# EAGLE board GNSS_Splitter-Panel (EAGLE 9.6.2), part 1 of 3
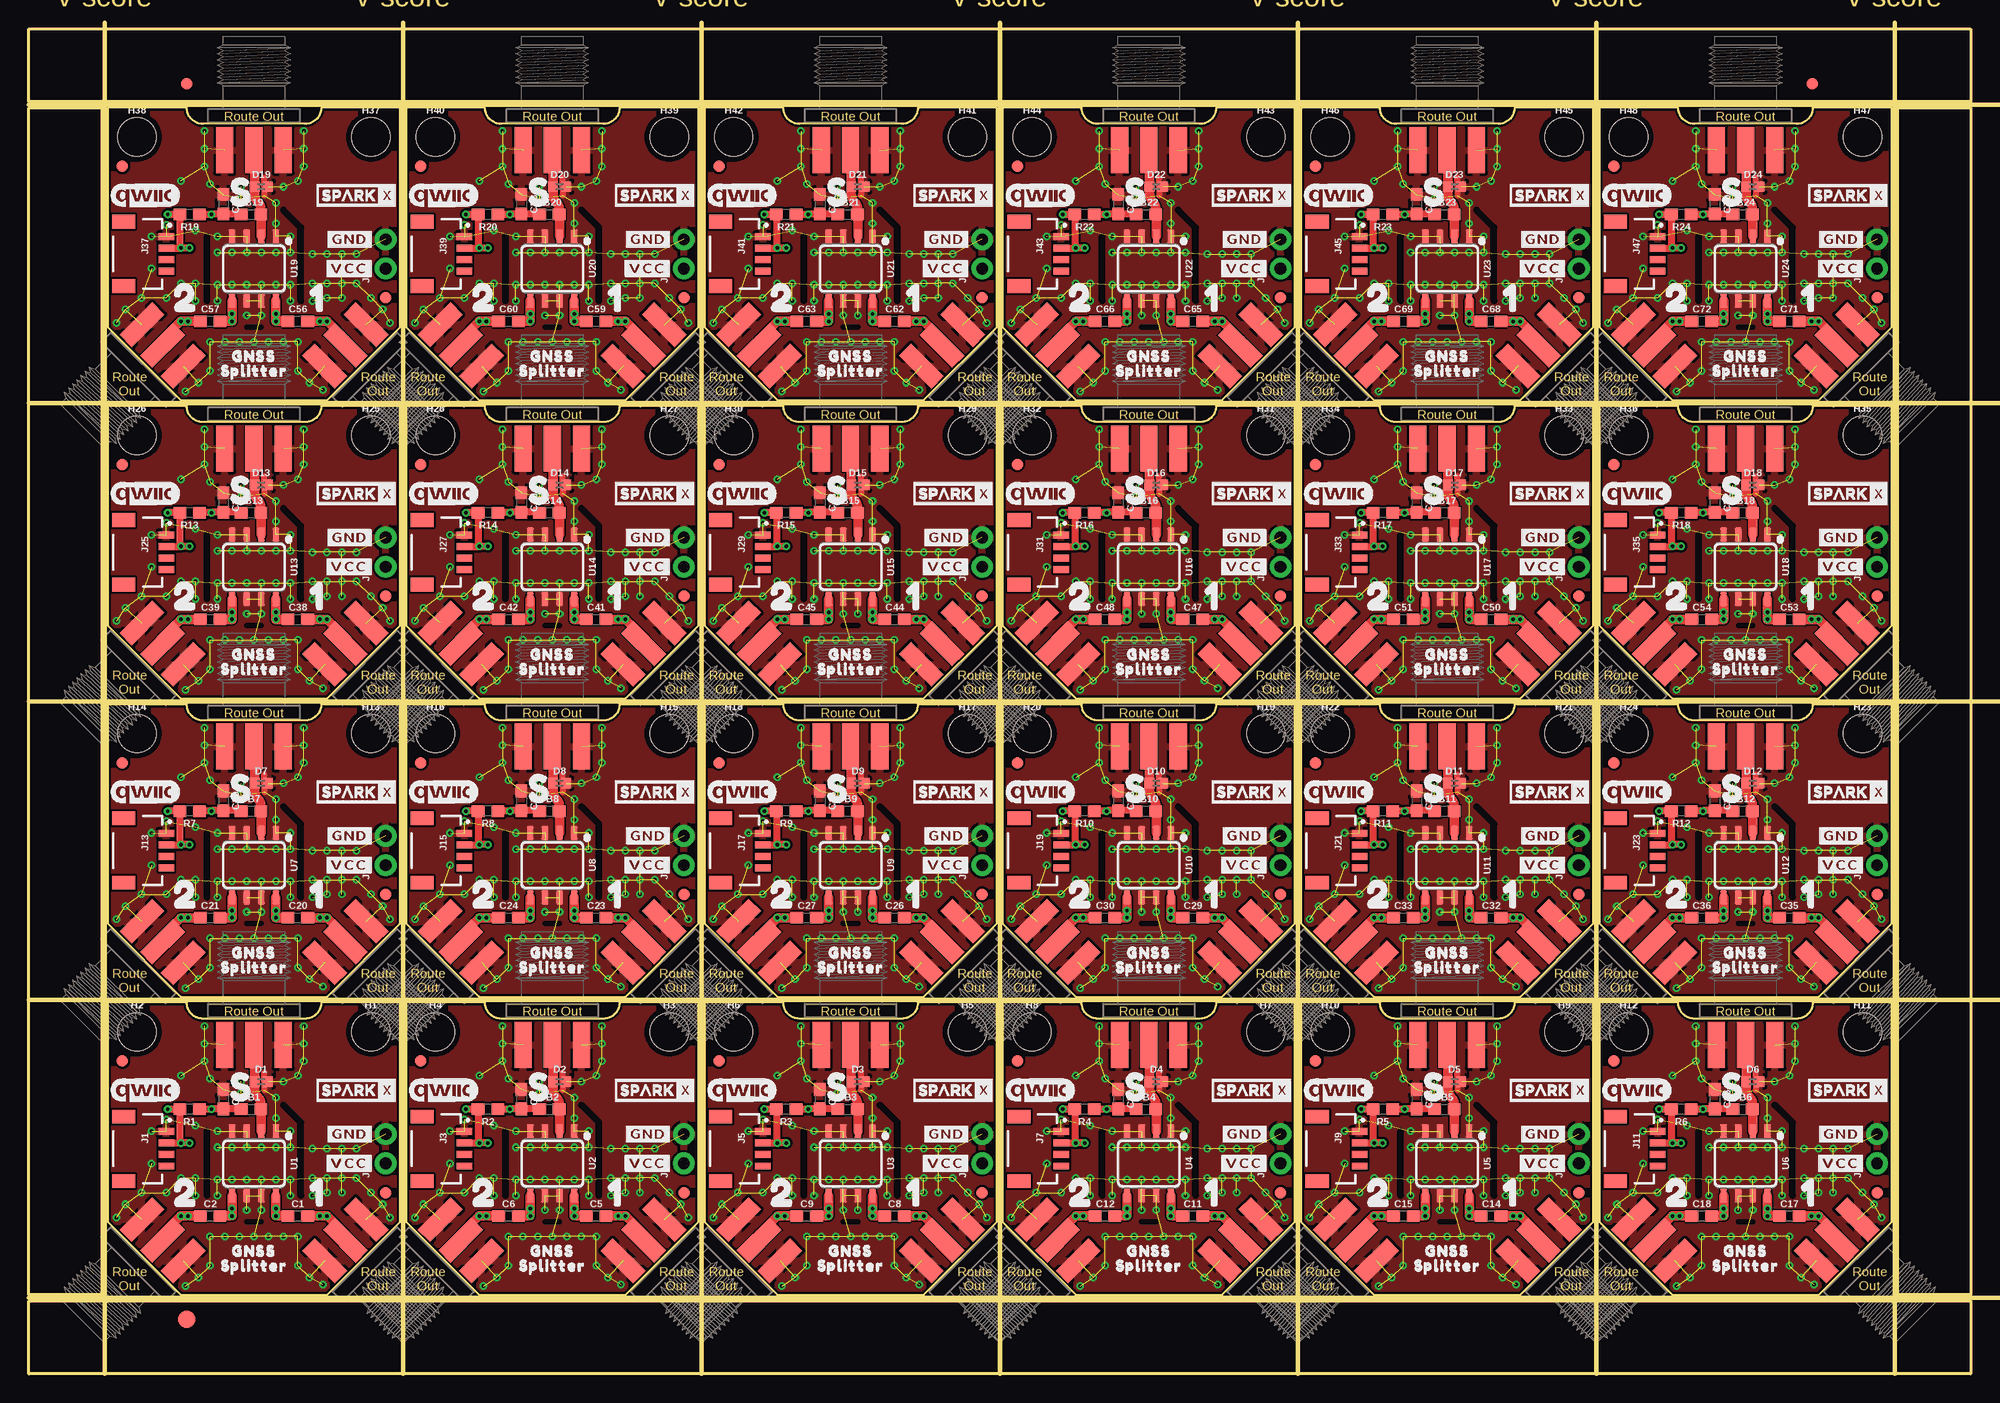
[diagram p0: board, top side]
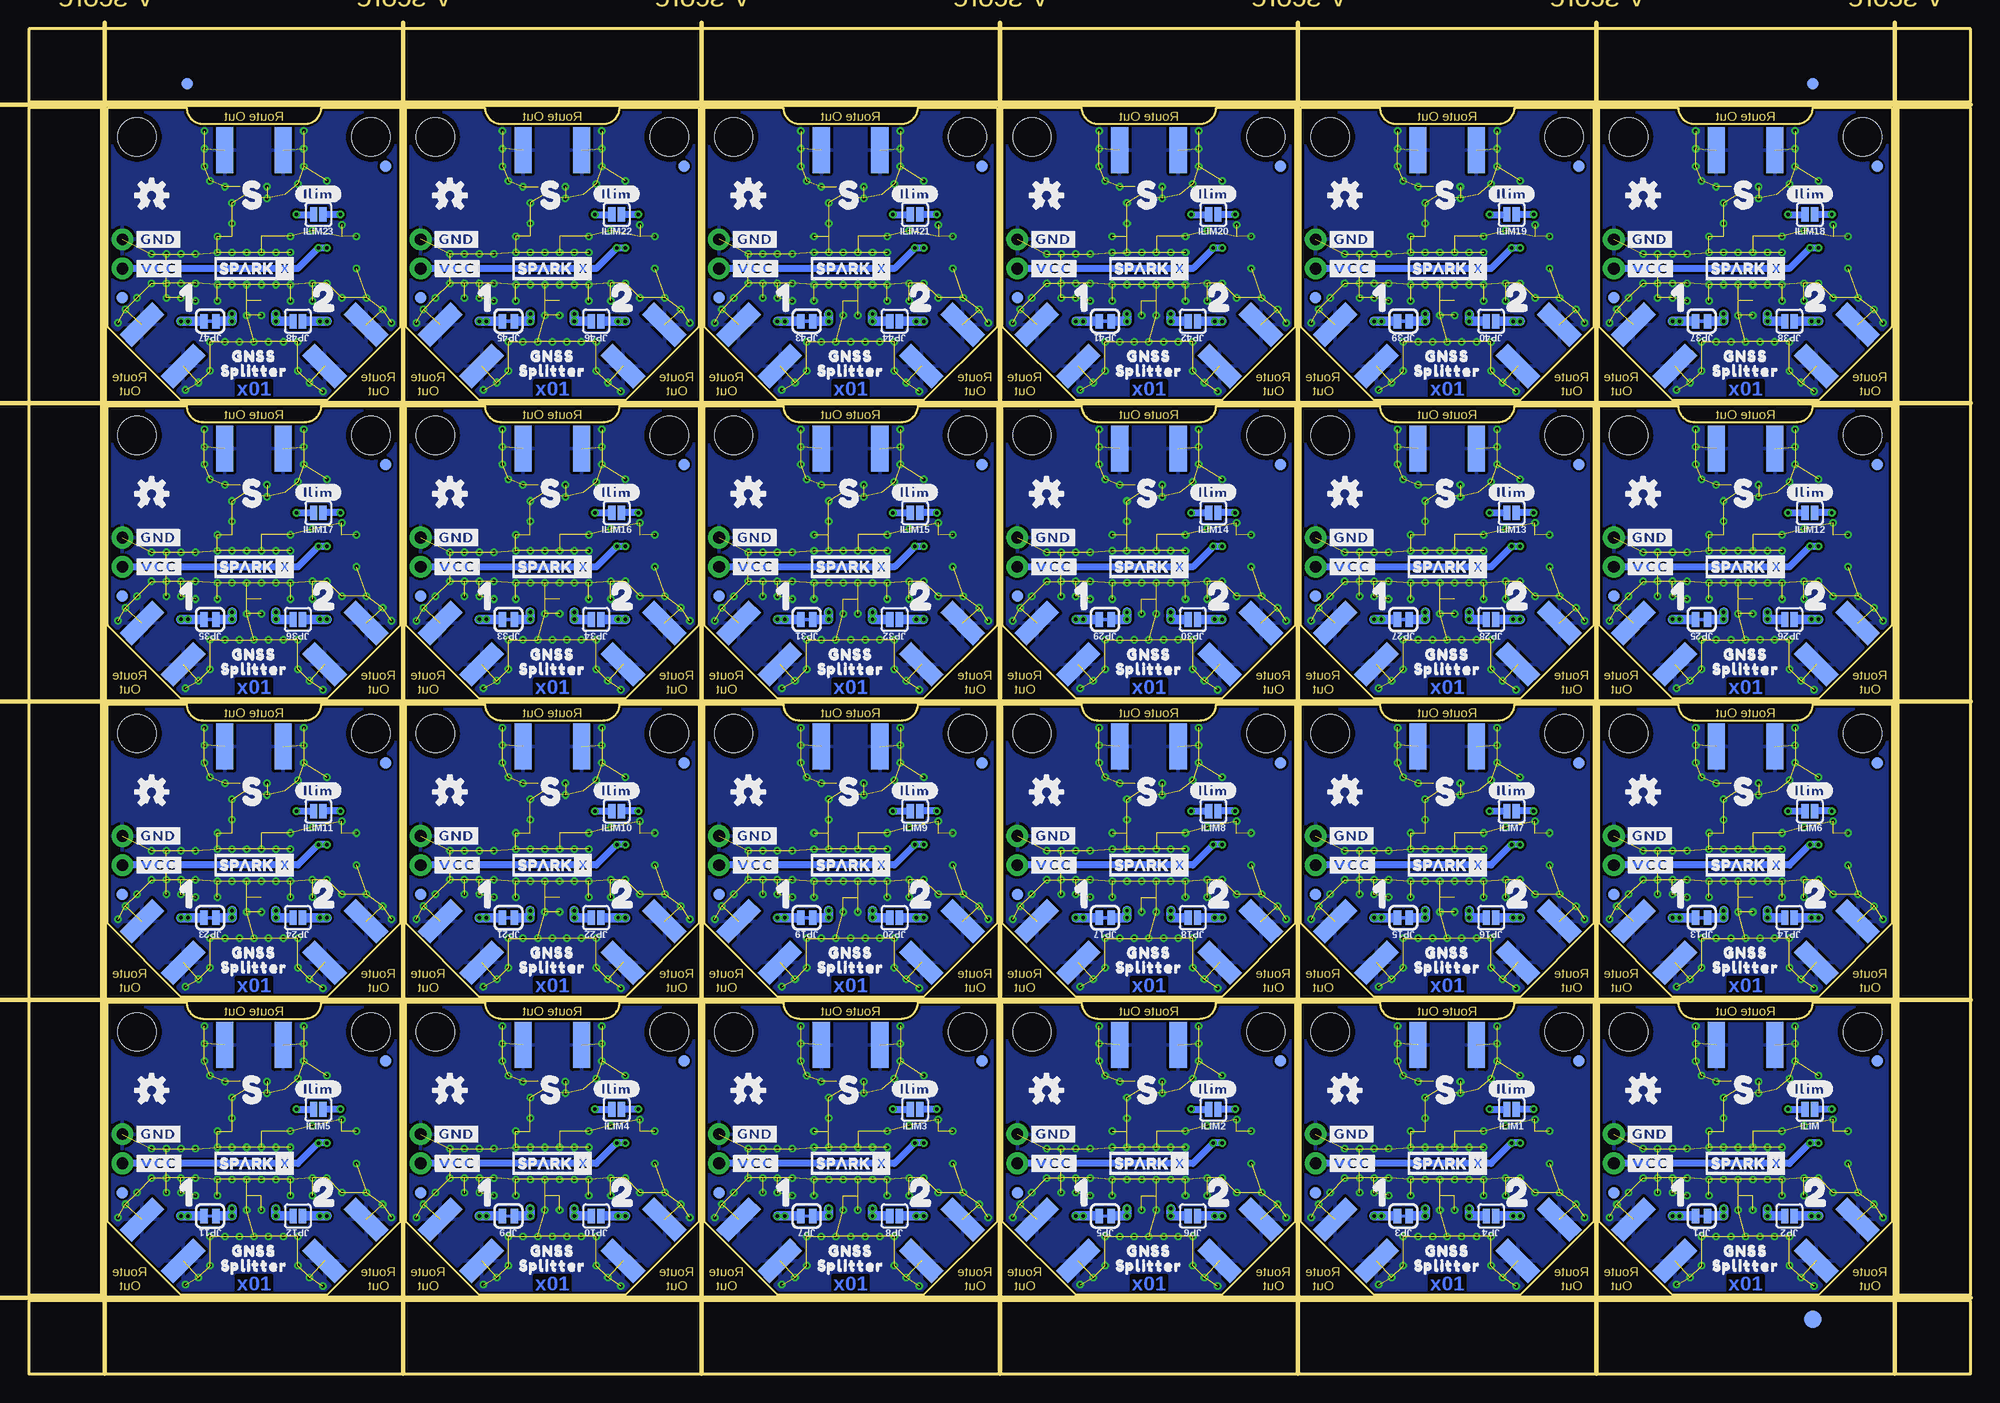
[diagram p1: board, bottom side, seen from below]

Size 168.66 x 116.84 mm. Coordinates in mm from the lower left corner, seen from the top.
Outline: 256 segments
Copper layers (1*16): Top 0.035mm / dielectric 1.5mm / Bottom 0.035mm
Design rules "GNSS_Splitter": minimum track width 7mil, minimum drill 0.3mm, track to track 5mil, track to pad 5mil, pad to pad 7mil, via to via 7mil, smd to smd 7mil, copper to edge 7mil, drill to drill 7mil, minimum pad ring 7mil, minimum via ring 7mil, stop-mask expansion 3mil, vias tented up to drill 25mil, thermal gap 10mil
tRestrict: 168 lines
Milling: 12 lines

## Footprints (pad centres in the part's own frame; a part is rotated, then mirrored left to right if it is on the bottom)
SMA-EDGE = smd 1.5 x 4: GND@0 -2.54,0; GND@1 2.54,0; SIG 0,0 | smd 1.5 x 4 bottom: GND@2 -2.54,0; GND@3 2.54,0
0603 = smd 1.1 x 1: 1 -0.85,0; 2 0.85,0
0402 = smd 0.85 x 0.9: 1 -0.58,0; 2 0.58,0
FIDUCIAL-1X2 = smd 1 x 1: 1 0,0
FIDUCIAL-1.5X3 = smd 1.5 x 1.5: 1 0,0
STAND-OFF = hole 3.302: 0,0
SMT-JUMPER_2_NO_SILK = smd 0.635 x 1.27: 1 -0.406,0; 2 0.406,0
JST04_1MM_RA = smd 0.6 x 1.35: 1 -1.5,0; 2 -0.5,0; 3 0.5,0; 4 1.5,0 | smd 1.2 x 2: NC1 2.8,-3.675; NC2 -2.8,-3.675
1X02_NO_SILK = drill 1.016 pad 1.88: 1 0,0; 2 2.54,0
SMT-JUMPER_2_NC_TRACE_SILK = smd 0.66 x 1.27: 1 -0.521,0; 2 0.521,0
XX21 = smd 0.6 x 1.2: 1 -1.905,-2.8; 2 -0.635,-2.8; 3 0.635,-2.8; 4 1.905,-2.8; 5 1.905,2.8; 6 0.635,2.8; 7 -0.635,2.8; 8 -1.905,2.8

## Placement (x,y rotation side)
1  ANTENNA-SMA-GROUNDEDEDGE_SMA  [SMA-EDGE]  27.5,11.62 225 top
2  ANTENNA-SMA-GROUNDEDEDGE_SMA  [SMA-EDGE]  11.62,11.62 135 top
3  ANTENNA-SMA-GROUNDEDEDGE_SMA  [SMA-EDGE]  37.53,11.62 135 top
4  ANTENNA-SMA-GROUNDEDEDGE_SMA  [SMA-EDGE]  53.4,11.62 225 top
5  ANTENNA-SMA-GROUNDEDEDGE_SMA  [SMA-EDGE]  63.44,11.62 135 top
6  ANTENNA-SMA-GROUNDEDEDGE_SMA  [SMA-EDGE]  79.31,11.62 225 top
7  ANTENNA-SMA-GROUNDEDEDGE_SMA  [SMA-EDGE]  89.34,11.62 135 top
8  ANTENNA-SMA-GROUNDEDEDGE_SMA  [SMA-EDGE]  105.22,11.62 225 top
9  ANTENNA-SMA-GROUNDEDEDGE_SMA  [SMA-EDGE]  115.25,11.62 135 top
10  ANTENNA-SMA-GROUNDEDEDGE_SMA  [SMA-EDGE]  131.13,11.62 225 top
11  ANTENNA-SMA-GROUNDEDEDGE_SMA  [SMA-EDGE]  141.16,11.62 135 top
12  ANTENNA-SMA-GROUNDEDEDGE_SMA  [SMA-EDGE]  157.04,11.62 225 top
13  ANTENNA-SMA-GROUNDEDEDGE_SMA  [SMA-EDGE]  11.62,37.53 135 top
14  ANTENNA-SMA-GROUNDEDEDGE_SMA  [SMA-EDGE]  27.5,37.53 225 top
15  ANTENNA-SMA-GROUNDEDEDGE_SMA  [SMA-EDGE]  37.53,37.53 135 top
16  ANTENNA-SMA-GROUNDEDEDGE_SMA  [SMA-EDGE]  53.4,37.53 225 top
17  ANTENNA-SMA-GROUNDEDEDGE_SMA  [SMA-EDGE]  63.44,37.53 135 top
18  ANTENNA-SMA-GROUNDEDEDGE_SMA  [SMA-EDGE]  79.31,37.53 225 top
19  ANTENNA-SMA-GROUNDEDEDGE_SMA  [SMA-EDGE]  89.34,37.53 135 top
20  ANTENNA-SMA-GROUNDEDEDGE_SMA  [SMA-EDGE]  105.22,37.53 225 top
21  ANTENNA-SMA-GROUNDEDEDGE_SMA  [SMA-EDGE]  115.25,37.53 135 top
22  ANTENNA-SMA-GROUNDEDEDGE_SMA  [SMA-EDGE]  131.13,37.53 225 top
23  ANTENNA-SMA-GROUNDEDEDGE_SMA  [SMA-EDGE]  141.16,37.53 135 top
24  ANTENNA-SMA-GROUNDEDEDGE_SMA  [SMA-EDGE]  157.04,37.53 225 top
25  ANTENNA-SMA-GROUNDEDEDGE_SMA  [SMA-EDGE]  11.62,63.44 135 top
26  ANTENNA-SMA-GROUNDEDEDGE_SMA  [SMA-EDGE]  27.5,63.44 225 top
27  ANTENNA-SMA-GROUNDEDEDGE_SMA  [SMA-EDGE]  37.53,63.44 135 top
28  ANTENNA-SMA-GROUNDEDEDGE_SMA  [SMA-EDGE]  53.4,63.44 225 top
29  ANTENNA-SMA-GROUNDEDEDGE_SMA  [SMA-EDGE]  63.44,63.44 135 top
30  ANTENNA-SMA-GROUNDEDEDGE_SMA  [SMA-EDGE]  79.31,63.44 225 top
31  ANTENNA-SMA-GROUNDEDEDGE_SMA  [SMA-EDGE]  89.34,63.44 135 top
32  ANTENNA-SMA-GROUNDEDEDGE_SMA  [SMA-EDGE]  105.22,63.44 225 top
33  ANTENNA-SMA-GROUNDEDEDGE_SMA  [SMA-EDGE]  115.25,63.44 135 top
34  ANTENNA-SMA-GROUNDEDEDGE_SMA  [SMA-EDGE]  131.13,63.44 225 top
35  ANTENNA-SMA-GROUNDEDEDGE_SMA  [SMA-EDGE]  141.16,63.44 135 top
36  ANTENNA-SMA-GROUNDEDEDGE_SMA  [SMA-EDGE]  157.04,63.44 225 top
37  ANTENNA-SMA-GROUNDEDEDGE_SMA  [SMA-EDGE]  11.62,89.34 135 top
38  ANTENNA-SMA-GROUNDEDEDGE_SMA  [SMA-EDGE]  27.5,89.34 225 top
39  ANTENNA-SMA-GROUNDEDEDGE_SMA  [SMA-EDGE]  37.53,89.34 135 top
40  ANTENNA-SMA-GROUNDEDEDGE_SMA  [SMA-EDGE]  53.4,89.34 225 top
41  ANTENNA-SMA-GROUNDEDEDGE_SMA  [SMA-EDGE]  63.44,89.34 135 top
42  ANTENNA-SMA-GROUNDEDEDGE_SMA  [SMA-EDGE]  79.31,89.34 225 top
43  ANTENNA-SMA-GROUNDEDEDGE_SMA  [SMA-EDGE]  89.34,89.34 135 top
44  ANTENNA-SMA-GROUNDEDEDGE_SMA  [SMA-EDGE]  105.22,89.34 225 top
45  ANTENNA-SMA-GROUNDEDEDGE_SMA  [SMA-EDGE]  115.25,89.34 135 top
46  ANTENNA-SMA-GROUNDEDEDGE_SMA  [SMA-EDGE]  131.13,89.34 225 top
47  ANTENNA-SMA-GROUNDEDEDGE_SMA  [SMA-EDGE]  141.16,89.34 135 top
48  ANTENNA-SMA-GROUNDEDEDGE_SMA  [SMA-EDGE]  157.04,89.34 225 top
C1  47pF  [0603]  23.37,13.72 0 top
C2  47pF  [0603]  15.75,13.72 0 top
C3  47pF  [0603]  16.89,23.88 270 top
C4  47pF  [0603]  42.8,23.88 270 top
C5  47pF  [0603]  49.28,13.72 0 top
C6  47pF  [0603]  41.66,13.72 0 top
C7  47pF  [0603]  68.71,23.88 270 top
C8  47pF  [0603]  75.18,13.72 0 top
C9  47pF  [0603]  67.56,13.72 0 top
C10  47pF  [0603]  94.62,23.88 270 top
C11  47pF  [0603]  101.09,13.72 0 top
C12  47pF  [0603]  93.47,13.72 0 top
C13  47pF  [0603]  120.52,23.88 270 top
C14  47pF  [0603]  127,13.72 0 top
C15  47pF  [0603]  119.38,13.72 0 top
C16  47pF  [0603]  146.43,23.88 270 top
C17  47pF  [0603]  152.91,13.72 0 top
C18  47pF  [0603]  145.29,13.72 0 top
C19  47pF  [0603]  16.89,49.78 270 top
C20  47pF  [0603]  23.37,39.62 0 top
C21  47pF  [0603]  15.75,39.62 0 top
C22  47pF  [0603]  42.8,49.78 270 top
C23  47pF  [0603]  49.28,39.62 0 top
C24  47pF  [0603]  41.66,39.62 0 top
C25  47pF  [0603]  68.71,49.78 270 top
C26  47pF  [0603]  75.18,39.62 0 top
C27  47pF  [0603]  67.56,39.62 0 top
C28  47pF  [0603]  94.62,49.78 270 top
C29  47pF  [0603]  101.09,39.62 0 top
C30  47pF  [0603]  93.47,39.62 0 top
C31  47pF  [0603]  120.52,49.78 270 top
C32  47pF  [0603]  127,39.62 0 top
C33  47pF  [0603]  119.38,39.62 0 top
C34  47pF  [0603]  146.43,49.78 270 top
C35  47pF  [0603]  152.91,39.62 0 top
C36  47pF  [0603]  145.29,39.62 0 top
C37  47pF  [0603]  16.89,75.69 270 top
C38  47pF  [0603]  23.37,65.53 0 top
C39  47pF  [0603]  15.75,65.53 0 top
C40  47pF  [0603]  42.8,75.69 270 top
C41  47pF  [0603]  49.28,65.53 0 top
C42  47pF  [0603]  41.66,65.53 0 top
C43  47pF  [0603]  68.71,75.69 270 top
C44  47pF  [0603]  75.18,65.53 0 top
C45  47pF  [0603]  67.56,65.53 0 top
C46  47pF  [0603]  94.62,75.69 270 top
C47  47pF  [0603]  101.09,65.53 0 top
C48  47pF  [0603]  93.47,65.53 0 top
C49  47pF  [0603]  120.52,75.69 270 top
C50  47pF  [0603]  127,65.53 0 top
C51  47pF  [0603]  119.38,65.53 0 top
C52  47pF  [0603]  146.43,75.69 270 top
C53  47pF  [0603]  152.91,65.53 0 top
C54  47pF  [0603]  145.29,65.53 0 top
C55  47pF  [0603]  16.89,101.6 270 top
C56  47pF  [0603]  23.37,91.44 0 top
C57  47pF  [0603]  15.75,91.44 0 top
C58  47pF  [0603]  42.8,101.6 270 top
C59  47pF  [0603]  49.28,91.44 0 top
C60  47pF  [0603]  41.66,91.44 0 top
C61  47pF  [0603]  68.71,101.6 270 top
C62  47pF  [0603]  75.18,91.44 0 top
C63  47pF  [0603]  67.56,91.44 0 top
C64  47pF  [0603]  94.62,101.6 270 top
C65  47pF  [0603]  101.09,91.44 0 top
C66  47pF  [0603]  93.47,91.44 0 top
C67  47pF  [0603]  120.52,101.6 270 top
C68  47pF  [0603]  127,91.44 0 top
C69  47pF  [0603]  119.38,91.44 0 top
C70  47pF  [0603]  146.43,101.6 270 top
C71  47pF  [0603]  152.91,91.44 0 top
C72  47pF  [0603]  145.29,91.44 0 top
D1  PESD0402-0402  [0402]  20.19,25.4 0 top
D2  PESD0402-0402  [0402]  46.1,25.4 0 top
D3  PESD0402-0402  [0402]  72.01,25.4 0 top
D4  PESD0402-0402  [0402]  97.92,25.4 0 top
D5  PESD0402-0402  [0402]  123.83,25.4 0 top
D6  PESD0402-0402  [0402]  149.73,25.4 0 top
D7  PESD0402-0402  [0402]  20.19,51.31 0 top
D8  PESD0402-0402  [0402]  46.1,51.31 0 top
D9  PESD0402-0402  [0402]  72.01,51.31 0 top
D10  PESD0402-0402  [0402]  97.92,51.31 0 top
D11  PESD0402-0402  [0402]  123.83,51.31 0 top
D12  PESD0402-0402  [0402]  149.73,51.31 0 top
D13  PESD0402-0402  [0402]  20.19,77.22 0 top
D14  PESD0402-0402  [0402]  46.1,77.22 0 top
D15  PESD0402-0402  [0402]  72.01,77.22 0 top
D16  PESD0402-0402  [0402]  97.92,77.22 0 top
D17  PESD0402-0402  [0402]  123.83,77.22 0 top
D18  PESD0402-0402  [0402]  149.73,77.22 0 top
D19  PESD0402-0402  [0402]  20.19,103.12 0 top
D20  PESD0402-0402  [0402]  46.1,103.12 0 top
D21  PESD0402-0402  [0402]  72.01,103.12 0 top
D22  PESD0402-0402  [0402]  97.92,103.12 0 top
D23  PESD0402-0402  [0402]  123.83,103.12 0 top
D24  PESD0402-0402  [0402]  149.73,103.12 0 top
E$1  [FIDUCIAL-1X2]  13.72,112.08 0 top
E$2  [FIDUCIAL-1X2]  13.72,112.08 0 bottom
E$3  [FIDUCIAL-1X2]  154.88,112.08 0 top
E$4  [FIDUCIAL-1X2]  154.88,112.08 0 bottom
E$5  [FIDUCIAL-1.5X3]  13.72,4.76 0 top
E$6  [FIDUCIAL-1.5X3]  13.72,4.76 0 bottom
FB1  30Ω/1.8A  [0603]  19.3,22.99 0 top
FB2  30Ω/1.8A  [0603]  45.21,22.99 0 top
FB3  30Ω/1.8A  [0603]  71.12,22.99 0 top
FB4  30Ω/1.8A  [0603]  97.03,22.99 0 top
FB5  30Ω/1.8A  [0603]  122.94,22.99 0 top
FB6  30Ω/1.8A  [0603]  148.84,22.99 0 top
FB7  30Ω/1.8A  [0603]  19.3,48.89 0 top
FB8  30Ω/1.8A  [0603]  45.21,48.89 0 top
FB9  30Ω/1.8A  [0603]  71.12,48.89 0 top
FB10  30Ω/1.8A  [0603]  97.03,48.89 0 top
FB11  30Ω/1.8A  [0603]  122.94,48.89 0 top
FB12  30Ω/1.8A  [0603]  148.84,48.89 0 top
FB13  30Ω/1.8A  [0603]  19.3,74.8 0 top
FB14  30Ω/1.8A  [0603]  45.21,74.8 0 top
FB15  30Ω/1.8A  [0603]  71.12,74.8 0 top
FB16  30Ω/1.8A  [0603]  97.03,74.8 0 top
FB17  30Ω/1.8A  [0603]  122.94,74.8 0 top
FB18  30Ω/1.8A  [0603]  148.84,74.8 0 top
FB19  30Ω/1.8A  [0603]  19.3,100.71 0 top
FB20  30Ω/1.8A  [0603]  45.21,100.71 0 top
FB21  30Ω/1.8A  [0603]  71.12,100.71 0 top
FB22  30Ω/1.8A  [0603]  97.03,100.71 0 top
FB23  30Ω/1.8A  [0603]  122.94,100.71 0 top
FB24  30Ω/1.8A  [0603]  148.84,100.71 0 top
FD1  FIDUCIAL1X2  [FIDUCIAL-1X2]  8.13,27.18 0 bottom
FD2  FIDUCIAL1X2  [FIDUCIAL-1X2]  8.13,27.18 0 top
FD3  FIDUCIAL1X2  [FIDUCIAL-1X2]  30.99,15.75 0 bottom
FD4  FIDUCIAL1X2  [FIDUCIAL-1X2]  30.99,15.75 0 top
FD5  FIDUCIAL1X2  [FIDUCIAL-1X2]  34.04,27.18 0 bottom
FD6  FIDUCIAL1X2  [FIDUCIAL-1X2]  34.04,27.18 0 top
FD7  FIDUCIAL1X2  [FIDUCIAL-1X2]  56.9,15.75 0 bottom
FD8  FIDUCIAL1X2  [FIDUCIAL-1X2]  56.9,15.75 0 top
FD9  FIDUCIAL1X2  [FIDUCIAL-1X2]  59.94,27.18 0 bottom
FD10  FIDUCIAL1X2  [FIDUCIAL-1X2]  59.94,27.18 0 top
FD11  FIDUCIAL1X2  [FIDUCIAL-1X2]  82.8,15.75 0 bottom
FD12  FIDUCIAL1X2  [FIDUCIAL-1X2]  82.8,15.75 0 top
FD13  FIDUCIAL1X2  [FIDUCIAL-1X2]  85.85,27.18 0 bottom
FD14  FIDUCIAL1X2  [FIDUCIAL-1X2]  85.85,27.18 0 top
FD15  FIDUCIAL1X2  [FIDUCIAL-1X2]  108.71,15.75 0 bottom
FD16  FIDUCIAL1X2  [FIDUCIAL-1X2]  108.71,15.75 0 top
FD17  FIDUCIAL1X2  [FIDUCIAL-1X2]  111.76,27.18 0 bottom
FD18  FIDUCIAL1X2  [FIDUCIAL-1X2]  111.76,27.18 0 top
FD19  FIDUCIAL1X2  [FIDUCIAL-1X2]  134.62,15.75 0 bottom
FD20  FIDUCIAL1X2  [FIDUCIAL-1X2]  134.62,15.75 0 top
FD21  FIDUCIAL1X2  [FIDUCIAL-1X2]  137.67,27.18 0 bottom
FD22  FIDUCIAL1X2  [FIDUCIAL-1X2]  137.67,27.18 0 top
FD23  FIDUCIAL1X2  [FIDUCIAL-1X2]  160.53,15.75 0 bottom
FD24  FIDUCIAL1X2  [FIDUCIAL-1X2]  160.53,15.75 0 top
FD25  FIDUCIAL1X2  [FIDUCIAL-1X2]  8.13,53.09 0 bottom
FD26  FIDUCIAL1X2  [FIDUCIAL-1X2]  8.13,53.09 0 top
FD27  FIDUCIAL1X2  [FIDUCIAL-1X2]  30.99,41.66 0 bottom
FD28  FIDUCIAL1X2  [FIDUCIAL-1X2]  30.99,41.66 0 top
FD29  FIDUCIAL1X2  [FIDUCIAL-1X2]  34.04,53.09 0 bottom
FD30  FIDUCIAL1X2  [FIDUCIAL-1X2]  34.04,53.09 0 top
FD31  FIDUCIAL1X2  [FIDUCIAL-1X2]  56.9,41.66 0 bottom
FD32  FIDUCIAL1X2  [FIDUCIAL-1X2]  56.9,41.66 0 top
FD33  FIDUCIAL1X2  [FIDUCIAL-1X2]  59.94,53.09 0 bottom
FD34  FIDUCIAL1X2  [FIDUCIAL-1X2]  59.94,53.09 0 top
FD35  FIDUCIAL1X2  [FIDUCIAL-1X2]  82.8,41.66 0 bottom
FD36  FIDUCIAL1X2  [FIDUCIAL-1X2]  82.8,41.66 0 top
FD37  FIDUCIAL1X2  [FIDUCIAL-1X2]  85.85,53.09 0 bottom
FD38  FIDUCIAL1X2  [FIDUCIAL-1X2]  85.85,53.09 0 top
FD39  FIDUCIAL1X2  [FIDUCIAL-1X2]  108.71,41.66 0 bottom
FD40  FIDUCIAL1X2  [FIDUCIAL-1X2]  108.71,41.66 0 top
FD41  FIDUCIAL1X2  [FIDUCIAL-1X2]  111.76,53.09 0 bottom
FD42  FIDUCIAL1X2  [FIDUCIAL-1X2]  111.76,53.09 0 top
FD43  FIDUCIAL1X2  [FIDUCIAL-1X2]  134.62,41.66 0 bottom
FD44  FIDUCIAL1X2  [FIDUCIAL-1X2]  134.62,41.66 0 top
FD45  FIDUCIAL1X2  [FIDUCIAL-1X2]  137.67,53.09 0 bottom
FD46  FIDUCIAL1X2  [FIDUCIAL-1X2]  137.67,53.09 0 top
FD47  FIDUCIAL1X2  [FIDUCIAL-1X2]  160.53,41.66 0 bottom
FD48  FIDUCIAL1X2  [FIDUCIAL-1X2]  160.53,41.66 0 top
FD49  FIDUCIAL1X2  [FIDUCIAL-1X2]  8.13,78.99 0 bottom
FD50  FIDUCIAL1X2  [FIDUCIAL-1X2]  8.13,78.99 0 top
FD51  FIDUCIAL1X2  [FIDUCIAL-1X2]  30.99,67.56 0 bottom
FD52  FIDUCIAL1X2  [FIDUCIAL-1X2]  30.99,67.56 0 top
FD53  FIDUCIAL1X2  [FIDUCIAL-1X2]  34.04,78.99 0 bottom
FD54  FIDUCIAL1X2  [FIDUCIAL-1X2]  34.04,78.99 0 top
FD55  FIDUCIAL1X2  [FIDUCIAL-1X2]  56.9,67.56 0 bottom
FD56  FIDUCIAL1X2  [FIDUCIAL-1X2]  56.9,67.56 0 top
FD57  FIDUCIAL1X2  [FIDUCIAL-1X2]  59.94,78.99 0 bottom
FD58  FIDUCIAL1X2  [FIDUCIAL-1X2]  59.94,78.99 0 top
FD59  FIDUCIAL1X2  [FIDUCIAL-1X2]  82.8,67.56 0 bottom
FD60  FIDUCIAL1X2  [FIDUCIAL-1X2]  82.8,67.56 0 top
FD61  FIDUCIAL1X2  [FIDUCIAL-1X2]  85.85,78.99 0 bottom
FD62  FIDUCIAL1X2  [FIDUCIAL-1X2]  85.85,78.99 0 top
FD63  FIDUCIAL1X2  [FIDUCIAL-1X2]  108.71,67.56 0 bottom
FD64  FIDUCIAL1X2  [FIDUCIAL-1X2]  108.71,67.56 0 top
FD65  FIDUCIAL1X2  [FIDUCIAL-1X2]  111.76,78.99 0 bottom
FD66  FIDUCIAL1X2  [FIDUCIAL-1X2]  111.76,78.99 0 top
FD67  FIDUCIAL1X2  [FIDUCIAL-1X2]  134.62,67.56 0 bottom
FD68  FIDUCIAL1X2  [FIDUCIAL-1X2]  134.62,67.56 0 top
FD69  FIDUCIAL1X2  [FIDUCIAL-1X2]  137.67,78.99 0 bottom
FD70  FIDUCIAL1X2  [FIDUCIAL-1X2]  137.67,78.99 0 top
FD71  FIDUCIAL1X2  [FIDUCIAL-1X2]  160.53,67.56 0 bottom
FD72  FIDUCIAL1X2  [FIDUCIAL-1X2]  160.53,67.56 0 top
FD73  FIDUCIAL1X2  [FIDUCIAL-1X2]  8.13,104.9 0 bottom
FD74  FIDUCIAL1X2  [FIDUCIAL-1X2]  8.13,104.9 0 top
FD75  FIDUCIAL1X2  [FIDUCIAL-1X2]  30.99,93.47 0 bottom
FD76  FIDUCIAL1X2  [FIDUCIAL-1X2]  30.99,93.47 0 top
FD77  FIDUCIAL1X2  [FIDUCIAL-1X2]  34.04,104.9 0 bottom
FD78  FIDUCIAL1X2  [FIDUCIAL-1X2]  34.04,104.9 0 top
FD79  FIDUCIAL1X2  [FIDUCIAL-1X2]  56.9,93.47 0 bottom
FD80  FIDUCIAL1X2  [FIDUCIAL-1X2]  56.9,93.47 0 top
FD81  FIDUCIAL1X2  [FIDUCIAL-1X2]  59.94,104.9 0 bottom
FD82  FIDUCIAL1X2  [FIDUCIAL-1X2]  59.94,104.9 0 top
FD83  FIDUCIAL1X2  [FIDUCIAL-1X2]  82.8,93.47 0 bottom
FD84  FIDUCIAL1X2  [FIDUCIAL-1X2]  82.8,93.47 0 top
FD85  FIDUCIAL1X2  [FIDUCIAL-1X2]  85.85,104.9 0 bottom
FD86  FIDUCIAL1X2  [FIDUCIAL-1X2]  85.85,104.9 0 top
FD87  FIDUCIAL1X2  [FIDUCIAL-1X2]  108.71,93.47 0 bottom
FD88  FIDUCIAL1X2  [FIDUCIAL-1X2]  108.71,93.47 0 top
FD89  FIDUCIAL1X2  [FIDUCIAL-1X2]  111.76,104.9 0 bottom
FD90  FIDUCIAL1X2  [FIDUCIAL-1X2]  111.76,104.9 0 top
FD91  FIDUCIAL1X2  [FIDUCIAL-1X2]  134.62,93.47 0 bottom
FD92  FIDUCIAL1X2  [FIDUCIAL-1X2]  134.62,93.47 0 top
FD93  FIDUCIAL1X2  [FIDUCIAL-1X2]  137.67,104.9 0 bottom
FD94  FIDUCIAL1X2  [FIDUCIAL-1X2]  137.67,104.9 0 top
FD95  FIDUCIAL1X2  [FIDUCIAL-1X2]  160.53,93.47 0 bottom
FD96  FIDUCIAL1X2  [FIDUCIAL-1X2]  160.53,93.47 0 top
H1  STAND-OFF  [STAND-OFF]  29.72,29.72 0 top
H2  STAND-OFF  [STAND-OFF]  9.4,29.72 0 top
H3  STAND-OFF  [STAND-OFF]  55.63,29.72 0 top
H4  STAND-OFF  [STAND-OFF]  35.31,29.72 0 top
H5  STAND-OFF  [STAND-OFF]  81.53,29.72 0 top
H6  STAND-OFF  [STAND-OFF]  61.21,29.72 0 top
H7  STAND-OFF  [STAND-OFF]  107.44,29.72 0 top
H8  STAND-OFF  [STAND-OFF]  87.12,29.72 0 top
H9  STAND-OFF  [STAND-OFF]  133.35,29.72 0 top
H10  STAND-OFF  [STAND-OFF]  113.03,29.72 0 top
H11  STAND-OFF  [STAND-OFF]  159.26,29.72 0 top
H12  STAND-OFF  [STAND-OFF]  138.94,29.72 0 top
H13  STAND-OFF  [STAND-OFF]  29.72,55.63 0 top
H14  STAND-OFF  [STAND-OFF]  9.4,55.63 0 top
H15  STAND-OFF  [STAND-OFF]  55.63,55.63 0 top
H16  STAND-OFF  [STAND-OFF]  35.31,55.63 0 top
H17  STAND-OFF  [STAND-OFF]  81.53,55.63 0 top
H18  STAND-OFF  [STAND-OFF]  61.21,55.63 0 top
H19  STAND-OFF  [STAND-OFF]  107.44,55.63 0 top
H20  STAND-OFF  [STAND-OFF]  87.12,55.63 0 top
H21  STAND-OFF  [STAND-OFF]  133.35,55.63 0 top
H22  STAND-OFF  [STAND-OFF]  113.03,55.63 0 top
H23  STAND-OFF  [STAND-OFF]  159.26,55.63 0 top
H24  STAND-OFF  [STAND-OFF]  138.94,55.63 0 top
H25  STAND-OFF  [STAND-OFF]  29.72,81.53 0 top
H26  STAND-OFF  [STAND-OFF]  9.4,81.53 0 top
H27  STAND-OFF  [STAND-OFF]  55.63,81.53 0 top
H28  STAND-OFF  [STAND-OFF]  35.31,81.53 0 top
H29  STAND-OFF  [STAND-OFF]  81.53,81.53 0 top
H30  STAND-OFF  [STAND-OFF]  61.21,81.53 0 top
H31  STAND-OFF  [STAND-OFF]  107.44,81.53 0 top
H32  STAND-OFF  [STAND-OFF]  87.12,81.53 0 top
H33  STAND-OFF  [STAND-OFF]  133.35,81.53 0 top
H34  STAND-OFF  [STAND-OFF]  113.03,81.53 0 top
H35  STAND-OFF  [STAND-OFF]  159.26,81.53 0 top
H36  STAND-OFF  [STAND-OFF]  138.94,81.53 0 top
H37  STAND-OFF  [STAND-OFF]  29.72,107.44 0 top
H38  STAND-OFF  [STAND-OFF]  9.4,107.44 0 top
H39  STAND-OFF  [STAND-OFF]  55.63,107.44 0 top
H40  STAND-OFF  [STAND-OFF]  35.31,107.44 0 top
H41  STAND-OFF  [STAND-OFF]  81.53,107.44 0 top
H42  STAND-OFF  [STAND-OFF]  61.21,107.44 0 top
H43  STAND-OFF  [STAND-OFF]  107.44,107.44 0 top
H44  STAND-OFF  [STAND-OFF]  87.12,107.44 0 top
H45  STAND-OFF  [STAND-OFF]  133.35,107.44 0 top
H46  STAND-OFF  [STAND-OFF]  113.03,107.44 0 top
H47  STAND-OFF  [STAND-OFF]  159.26,107.44 0 top
H48  STAND-OFF  [STAND-OFF]  138.94,107.44 0 top
ILIM  JUMPER-SMT_2_NO_SILK  [SMT-JUMPER_2_NO_SILK]  13.97,22.99 180 bottom
ILIM1  JUMPER-SMT_2_NO_SILK  [SMT-JUMPER_2_NO_SILK]  39.88,22.99 180 bottom
ILIM2  JUMPER-SMT_2_NO_SILK  [SMT-JUMPER_2_NO_SILK]  65.79,22.99 180 bottom
ILIM3  JUMPER-SMT_2_NO_SILK  [SMT-JUMPER_2_NO_SILK]  91.69,22.99 180 bottom
ILIM4  JUMPER-SMT_2_NO_SILK  [SMT-JUMPER_2_NO_SILK]  117.6,22.99 180 bottom
ILIM5  JUMPER-SMT_2_NO_SILK  [SMT-JUMPER_2_NO_SILK]  143.51,22.99 180 bottom
ILIM6  JUMPER-SMT_2_NO_SILK  [SMT-JUMPER_2_NO_SILK]  13.97,48.89 180 bottom
ILIM7  JUMPER-SMT_2_NO_SILK  [SMT-JUMPER_2_NO_SILK]  39.88,48.89 180 bottom
ILIM8  JUMPER-SMT_2_NO_SILK  [SMT-JUMPER_2_NO_SILK]  65.79,48.89 180 bottom
ILIM9  JUMPER-SMT_2_NO_SILK  [SMT-JUMPER_2_NO_SILK]  91.69,48.89 180 bottom
ILIM10  JUMPER-SMT_2_NO_SILK  [SMT-JUMPER_2_NO_SILK]  117.6,48.89 180 bottom
ILIM11  JUMPER-SMT_2_NO_SILK  [SMT-JUMPER_2_NO_SILK]  143.51,48.89 180 bottom
ILIM12  JUMPER-SMT_2_NO_SILK  [SMT-JUMPER_2_NO_SILK]  13.97,74.8 180 bottom
ILIM13  JUMPER-SMT_2_NO_SILK  [SMT-JUMPER_2_NO_SILK]  39.88,74.8 180 bottom
ILIM14  JUMPER-SMT_2_NO_SILK  [SMT-JUMPER_2_NO_SILK]  65.79,74.8 180 bottom
ILIM15  JUMPER-SMT_2_NO_SILK  [SMT-JUMPER_2_NO_SILK]  91.69,74.8 180 bottom
ILIM16  JUMPER-SMT_2_NO_SILK  [SMT-JUMPER_2_NO_SILK]  117.6,74.8 180 bottom
ILIM17  JUMPER-SMT_2_NO_SILK  [SMT-JUMPER_2_NO_SILK]  143.51,74.8 180 bottom
ILIM18  JUMPER-SMT_2_NO_SILK  [SMT-JUMPER_2_NO_SILK]  13.97,100.71 180 bottom
ILIM19  JUMPER-SMT_2_NO_SILK  [SMT-JUMPER_2_NO_SILK]  39.88,100.71 180 bottom
ILIM20  JUMPER-SMT_2_NO_SILK  [SMT-JUMPER_2_NO_SILK]  65.79,100.71 180 bottom
ILIM21  JUMPER-SMT_2_NO_SILK  [SMT-JUMPER_2_NO_SILK]  91.69,100.71 180 bottom
ILIM22  JUMPER-SMT_2_NO_SILK  [SMT-JUMPER_2_NO_SILK]  117.6,100.71 180 bottom
ILIM23  JUMPER-SMT_2_NO_SILK  [SMT-JUMPER_2_NO_SILK]  143.51,100.71 180 bottom
J1  QWIIC_RIGHT_ANGLE  [JST04_1MM_RA]  11.94,19.56 270 top
J2  [1X02_NO_SILK]  30.99,18.29 90 top
J3  QWIIC_RIGHT_ANGLE  [JST04_1MM_RA]  37.85,19.56 270 top
J4  [1X02_NO_SILK]  56.9,18.29 90 top
J5  QWIIC_RIGHT_ANGLE  [JST04_1MM_RA]  63.75,19.56 270 top
J6  [1X02_NO_SILK]  82.8,18.29 90 top
J7  QWIIC_RIGHT_ANGLE  [JST04_1MM_RA]  89.66,19.56 270 top
J8  [1X02_NO_SILK]  108.71,18.29 90 top
J9  QWIIC_RIGHT_ANGLE  [JST04_1MM_RA]  115.57,19.56 270 top
J10  [1X02_NO_SILK]  134.62,18.29 90 top
J11  QWIIC_RIGHT_ANGLE  [JST04_1MM_RA]  141.48,19.56 270 top
J12  [1X02_NO_SILK]  160.53,18.29 90 top
J13  QWIIC_RIGHT_ANGLE  [JST04_1MM_RA]  11.94,45.47 270 top
J14  [1X02_NO_SILK]  30.99,44.2 90 top
J15  QWIIC_RIGHT_ANGLE  [JST04_1MM_RA]  37.85,45.47 270 top
J16  [1X02_NO_SILK]  56.9,44.2 90 top
J17  QWIIC_RIGHT_ANGLE  [JST04_1MM_RA]  63.75,45.47 270 top
J18  [1X02_NO_SILK]  82.8,44.2 90 top
J19  QWIIC_RIGHT_ANGLE  [JST04_1MM_RA]  89.66,45.47 270 top
J20  [1X02_NO_SILK]  108.71,44.2 90 top
J21  QWIIC_RIGHT_ANGLE  [JST04_1MM_RA]  115.57,45.47 270 top
J22  [1X02_NO_SILK]  134.62,44.2 90 top
J23  QWIIC_RIGHT_ANGLE  [JST04_1MM_RA]  141.48,45.47 270 top
J24  [1X02_NO_SILK]  160.53,44.2 90 top
J25  QWIIC_RIGHT_ANGLE  [JST04_1MM_RA]  11.94,71.37 270 top
J26  [1X02_NO_SILK]  30.99,70.1 90 top
J27  QWIIC_RIGHT_ANGLE  [JST04_1MM_RA]  37.85,71.37 270 top
J28  [1X02_NO_SILK]  56.9,70.1 90 top
J29  QWIIC_RIGHT_ANGLE  [JST04_1MM_RA]  63.75,71.37 270 top
J30  [1X02_NO_SILK]  82.8,70.1 90 top
J31  QWIIC_RIGHT_ANGLE  [JST04_1MM_RA]  89.66,71.37 270 top
J32  [1X02_NO_SILK]  108.71,70.1 90 top
J33  QWIIC_RIGHT_ANGLE  [JST04_1MM_RA]  115.57,71.37 270 top
J34  [1X02_NO_SILK]  134.62,70.1 90 top
J35  QWIIC_RIGHT_ANGLE  [JST04_1MM_RA]  141.48,71.37 270 top
J36  [1X02_NO_SILK]  160.53,70.1 90 top
J37  QWIIC_RIGHT_ANGLE  [JST04_1MM_RA]  11.94,97.28 270 top
J38  [1X02_NO_SILK]  30.99,96.01 90 top
J39  QWIIC_RIGHT_ANGLE  [JST04_1MM_RA]  37.85,97.28 270 top
J40  [1X02_NO_SILK]  56.9,96.01 90 top
J41  QWIIC_RIGHT_ANGLE  [JST04_1MM_RA]  63.75,97.28 270 top
J42  [1X02_NO_SILK]  82.8,96.01 90 top
J43  QWIIC_RIGHT_ANGLE  [JST04_1MM_RA]  89.66,97.28 270 top
J44  [1X02_NO_SILK]  108.71,96.01 90 top
J45  QWIIC_RIGHT_ANGLE  [JST04_1MM_RA]  115.57,97.28 270 top
J46  [1X02_NO_SILK]  134.62,96.01 90 top
J47  QWIIC_RIGHT_ANGLE  [JST04_1MM_RA]  141.48,97.28 270 top
J48  [1X02_NO_SILK]  160.53,96.01 90 top
JP1  JUMPER-SMT_2_NC_TRACE_SILK  [SMT-JUMPER_2_NC_TRACE_SILK]  23.37,13.72 180 bottom
JP2  JUMPER-SMT_2_NO_SILK  [SMT-JUMPER_2_NO_SILK]  15.75,13.72 180 bottom
JP3  JUMPER-SMT_2_NC_TRACE_SILK  [SMT-JUMPER_2_NC_TRACE_SILK]  49.28,13.72 180 bottom
JP4  JUMPER-SMT_2_NO_SILK  [SMT-JUMPER_2_NO_SILK]  41.66,13.72 180 bottom
JP5  JUMPER-SMT_2_NC_TRACE_SILK  [SMT-JUMPER_2_NC_TRACE_SILK]  75.18,13.72 180 bottom
JP6  JUMPER-SMT_2_NO_SILK  [SMT-JUMPER_2_NO_SILK]  67.56,13.72 180 bottom
JP7  JUMPER-SMT_2_NC_TRACE_SILK  [SMT-JUMPER_2_NC_TRACE_SILK]  101.09,13.72 180 bottom
JP8  JUMPER-SMT_2_NO_SILK  [SMT-JUMPER_2_NO_SILK]  93.47,13.72 180 bottom
JP9  JUMPER-SMT_2_NC_TRACE_SILK  [SMT-JUMPER_2_NC_TRACE_SILK]  127,13.72 180 bottom
JP10  JUMPER-SMT_2_NO_SILK  [SMT-JUMPER_2_NO_SILK]  119.38,13.72 180 bottom
JP11  JUMPER-SMT_2_NC_TRACE_SILK  [SMT-JUMPER_2_NC_TRACE_SILK]  152.91,13.72 180 bottom
JP12  JUMPER-SMT_2_NO_SILK  [SMT-JUMPER_2_NO_SILK]  145.29,13.72 180 bottom
JP13  JUMPER-SMT_2_NC_TRACE_SILK  [SMT-JUMPER_2_NC_TRACE_SILK]  23.37,39.62 180 bottom
JP14  JUMPER-SMT_2_NO_SILK  [SMT-JUMPER_2_NO_SILK]  15.75,39.62 180 bottom
JP15  JUMPER-SMT_2_NC_TRACE_SILK  [SMT-JUMPER_2_NC_TRACE_SILK]  49.28,39.62 180 bottom
JP16  JUMPER-SMT_2_NO_SILK  [SMT-JUMPER_2_NO_SILK]  41.66,39.62 180 bottom
JP17  JUMPER-SMT_2_NC_TRACE_SILK  [SMT-JUMPER_2_NC_TRACE_SILK]  75.18,39.62 180 bottom
JP18  JUMPER-SMT_2_NO_SILK  [SMT-JUMPER_2_NO_SILK]  67.56,39.62 180 bottom
JP19  JUMPER-SMT_2_NC_TRACE_SILK  [SMT-JUMPER_2_NC_TRACE_SILK]  101.09,39.62 180 bottom
JP20  JUMPER-SMT_2_NO_SILK  [SMT-JUMPER_2_NO_SILK]  93.47,39.62 180 bottom
JP21  JUMPER-SMT_2_NC_TRACE_SILK  [SMT-JUMPER_2_NC_TRACE_SILK]  127,39.62 180 bottom
JP22  JUMPER-SMT_2_NO_SILK  [SMT-JUMPER_2_NO_SILK]  119.38,39.62 180 bottom
JP23  JUMPER-SMT_2_NC_TRACE_SILK  [SMT-JUMPER_2_NC_TRACE_SILK]  152.91,39.62 180 bottom
JP24  JUMPER-SMT_2_NO_SILK  [SMT-JUMPER_2_NO_SILK]  145.29,39.62 180 bottom
JP25  JUMPER-SMT_2_NC_TRACE_SILK  [SMT-JUMPER_2_NC_TRACE_SILK]  23.37,65.53 180 bottom
JP26  JUMPER-SMT_2_NO_SILK  [SMT-JUMPER_2_NO_SILK]  15.75,65.53 180 bottom
JP27  JUMPER-SMT_2_NC_TRACE_SILK  [SMT-JUMPER_2_NC_TRACE_SILK]  49.28,65.53 180 bottom
JP28  JUMPER-SMT_2_NO_SILK  [SMT-JUMPER_2_NO_SILK]  41.66,65.53 180 bottom
JP29  JUMPER-SMT_2_NC_TRACE_SILK  [SMT-JUMPER_2_NC_TRACE_SILK]  75.18,65.53 180 bottom
JP30  JUMPER-SMT_2_NO_SILK  [SMT-JUMPER_2_NO_SILK]  67.56,65.53 180 bottom
JP31  JUMPER-SMT_2_NC_TRACE_SILK  [SMT-JUMPER_2_NC_TRACE_SILK]  101.09,65.53 180 bottom
JP32  JUMPER-SMT_2_NO_SILK  [SMT-JUMPER_2_NO_SILK]  93.47,65.53 180 bottom
JP33  JUMPER-SMT_2_NC_TRACE_SILK  [SMT-JUMPER_2_NC_TRACE_SILK]  127,65.53 180 bottom
JP34  JUMPER-SMT_2_NO_SILK  [SMT-JUMPER_2_NO_SILK]  119.38,65.53 180 bottom
JP35  JUMPER-SMT_2_NC_TRACE_SILK  [SMT-JUMPER_2_NC_TRACE_SILK]  152.91,65.53 180 bottom
JP36  JUMPER-SMT_2_NO_SILK  [SMT-JUMPER_2_NO_SILK]  145.29,65.53 180 bottom
JP37  JUMPER-SMT_2_NC_TRACE_SILK  [SMT-JUMPER_2_NC_TRACE_SILK]  23.37,91.44 180 bottom
JP38  JUMPER-SMT_2_NO_SILK  [SMT-JUMPER_2_NO_SILK]  15.75,91.44 180 bottom
JP39  JUMPER-SMT_2_NC_TRACE_SILK  [SMT-JUMPER_2_NC_TRACE_SILK]  49.28,91.44 180 bottom
JP40  JUMPER-SMT_2_NO_SILK  [SMT-JUMPER_2_NO_SILK]  41.66,91.44 180 bottom
JP41  JUMPER-SMT_2_NC_TRACE_SILK  [SMT-JUMPER_2_NC_TRACE_SILK]  75.18,91.44 180 bottom
JP42  JUMPER-SMT_2_NO_SILK  [SMT-JUMPER_2_NO_SILK]  67.56,91.44 180 bottom
JP43  JUMPER-SMT_2_NC_TRACE_SILK  [SMT-JUMPER_2_NC_TRACE_SILK]  101.09,91.44 180 bottom
JP44  JUMPER-SMT_2_NO_SILK  [SMT-JUMPER_2_NO_SILK]  93.47,91.44 180 bottom
JP45  JUMPER-SMT_2_NC_TRACE_SILK  [SMT-JUMPER_2_NC_TRACE_SILK]  127,91.44 180 bottom
JP46  JUMPER-SMT_2_NO_SILK  [SMT-JUMPER_2_NO_SILK]  119.38,91.44 180 bottom
JP47  JUMPER-SMT_2_NC_TRACE_SILK  [SMT-JUMPER_2_NC_TRACE_SILK]  152.91,91.44 180 bottom
JP48  JUMPER-SMT_2_NO_SILK  [SMT-JUMPER_2_NO_SILK]  145.29,91.44 180 bottom
LOGO1  OSHW-LOGOS  [OSHW-LOGO-S]  28.45,24.64 0 bottom
LOGO2  QWIIC_LOGO_6MM  [QWIIC_6MM]  10.16,24.64 0 top
LOGO3  OSHW-LOGOS  [OSHW-LOGO-S]  54.36,24.64 0 bottom
LOGO4  QWIIC_LOGO_6MM  [QWIIC_6MM]  36.07,24.64 0 top
LOGO5  OSHW-LOGOS  [OSHW-LOGO-S]  80.26,24.64 0 bottom
LOGO6  QWIIC_LOGO_6MM  [QWIIC_6MM]  61.98,24.64 0 top
LOGO7  OSHW-LOGOS  [OSHW-LOGO-S]  106.17,24.64 0 bottom
LOGO8  QWIIC_LOGO_6MM  [QWIIC_6MM]  87.88,24.64 0 top
LOGO9  OSHW-LOGOS  [OSHW-LOGO-S]  132.08,24.64 0 bottom
LOGO10  QWIIC_LOGO_6MM  [QWIIC_6MM]  113.79,24.64 0 top
LOGO11  OSHW-LOGOS  [OSHW-LOGO-S]  157.99,24.64 0 bottom
LOGO12  QWIIC_LOGO_6MM  [QWIIC_6MM]  139.7,24.64 0 top
LOGO13  OSHW-LOGOS  [OSHW-LOGO-S]  28.45,50.55 0 bottom
LOGO14  QWIIC_LOGO_6MM  [QWIIC_6MM]  10.16,50.55 0 top
LOGO15  OSHW-LOGOS  [OSHW-LOGO-S]  54.36,50.55 0 bottom
LOGO16  QWIIC_LOGO_6MM  [QWIIC_6MM]  36.07,50.55 0 top
LOGO17  OSHW-LOGOS  [OSHW-LOGO-S]  80.26,50.55 0 bottom
LOGO18  QWIIC_LOGO_6MM  [QWIIC_6MM]  61.98,50.55 0 top
LOGO19  OSHW-LOGOS  [OSHW-LOGO-S]  106.17,50.55 0 bottom
LOGO20  QWIIC_LOGO_6MM  [QWIIC_6MM]  87.88,50.55 0 top
LOGO21  OSHW-LOGOS  [OSHW-LOGO-S]  132.08,50.55 0 bottom
LOGO22  QWIIC_LOGO_6MM  [QWIIC_6MM]  113.79,50.55 0 top
LOGO23  OSHW-LOGOS  [OSHW-LOGO-S]  157.99,50.55 0 bottom
LOGO24  QWIIC_LOGO_6MM  [QWIIC_6MM]  139.7,50.55 0 top
LOGO25  OSHW-LOGOS  [OSHW-LOGO-S]  28.45,76.45 0 bottom
LOGO26  QWIIC_LOGO_6MM  [QWIIC_6MM]  10.16,76.45 0 top
LOGO27  OSHW-LOGOS  [OSHW-LOGO-S]  54.36,76.45 0 bottom
LOGO28  QWIIC_LOGO_6MM  [QWIIC_6MM]  36.07,76.45 0 top
LOGO29  OSHW-LOGOS  [OSHW-LOGO-S]  80.26,76.45 0 bottom
LOGO30  QWIIC_LOGO_6MM  [QWIIC_6MM]  61.98,76.45 0 top
LOGO31  OSHW-LOGOS  [OSHW-LOGO-S]  106.17,76.45 0 bottom
LOGO32  QWIIC_LOGO_6MM  [QWIIC_6MM]  87.88,76.45 0 top
LOGO33  OSHW-LOGOS  [OSHW-LOGO-S]  132.08,76.45 0 bottom
LOGO34  QWIIC_LOGO_6MM  [QWIIC_6MM]  113.79,76.45 0 top
LOGO35  OSHW-LOGOS  [OSHW-LOGO-S]  157.99,76.45 0 bottom
LOGO36  QWIIC_LOGO_6MM  [QWIIC_6MM]  139.7,76.45 0 top
LOGO37  OSHW-LOGOS  [OSHW-LOGO-S]  28.45,102.36 0 bottom
LOGO38  QWIIC_LOGO_6MM  [QWIIC_6MM]  10.16,102.36 0 top
LOGO39  OSHW-LOGOS  [OSHW-LOGO-S]  54.36,102.36 0 bottom
LOGO40  QWIIC_LOGO_6MM  [QWIIC_6MM]  36.07,102.36 0 top
LOGO41  OSHW-LOGOS  [OSHW-LOGO-S]  80.26,102.36 0 bottom
LOGO42  QWIIC_LOGO_6MM  [QWIIC_6MM]  61.98,102.36 0 top
LOGO43  OSHW-LOGOS  [OSHW-LOGO-S]  106.17,102.36 0 bottom
LOGO44  QWIIC_LOGO_6MM  [QWIIC_6MM]  87.88,102.36 0 top
LOGO45  OSHW-LOGOS  [OSHW-LOGO-S]  132.08,102.36 0 bottom
LOGO46  QWIIC_LOGO_6MM  [QWIIC_6MM]  113.79,102.36 0 top
LOGO47  OSHW-LOGOS  [OSHW-LOGO-S]  157.99,102.36 0 bottom
LOGO48  QWIIC_LOGO_6MM  [QWIIC_6MM]  139.7,102.36 0 top
R1  10  [0603]  13.97,22.99 180 top
R2  10  [0603]  39.88,22.99 180 top
R3  10  [0603]  65.79,22.99 180 top
R4  10  [0603]  91.69,22.99 180 top
R5  10  [0603]  117.6,22.99 180 top
R6  10  [0603]  143.51,22.99 180 top
R7  10  [0603]  13.97,48.89 180 top
R8  10  [0603]  39.88,48.89 180 top
R9  10  [0603]  65.79,48.89 180 top
R10  10  [0603]  91.69,48.89 180 top
R11  10  [0603]  117.6,48.89 180 top
R12  10  [0603]  143.51,48.89 180 top
R13  10  [0603]  13.97,74.8 180 top
R14  10  [0603]  39.88,74.8 180 top
R15  10  [0603]  65.79,74.8 180 top
R16  10  [0603]  91.69,74.8 180 top
R17  10  [0603]  117.6,74.8 180 top
R18  10  [0603]  143.51,74.8 180 top
R19  10  [0603]  13.97,100.71 180 top
R20  10  [0603]  39.88,100.71 180 top
R21  10  [0603]  65.79,100.71 180 top
R22  10  [0603]  91.69,100.71 180 top
R23  10  [0603]  117.6,100.71 180 top
R24  10  [0603]  143.51,100.71 180 top
S  ANTENNA-SMA-GROUNDEDEDGE_SMA  [SMA-EDGE]  19.56,28.57 0 top
S1  ANTENNA-SMA-GROUNDEDEDGE_SMA  [SMA-EDGE]  45.47,28.57 0 top
S2  ANTENNA-SMA-GROUNDEDEDGE_SMA  [SMA-EDGE]  71.37,28.57 0 top
S3  ANTENNA-SMA-GROUNDEDEDGE_SMA  [SMA-EDGE]  97.28,28.57 0 top
S4  ANTENNA-SMA-GROUNDEDEDGE_SMA  [SMA-EDGE]  123.19,28.57 0 top
S5  ANTENNA-SMA-GROUNDEDEDGE_SMA  [SMA-EDGE]  149.1,28.57 0 top
S6  ANTENNA-SMA-GROUNDEDEDGE_SMA  [SMA-EDGE]  19.56,54.48 0 top
S7  ANTENNA-SMA-GROUNDEDEDGE_SMA  [SMA-EDGE]  45.47,54.48 0 top
S8  ANTENNA-SMA-GROUNDEDEDGE_SMA  [SMA-EDGE]  71.37,54.48 0 top
S9  ANTENNA-SMA-GROUNDEDEDGE_SMA  [SMA-EDGE]  97.28,54.48 0 top
S10  ANTENNA-SMA-GROUNDEDEDGE_SMA  [SMA-EDGE]  123.19,54.48 0 top
S11  ANTENNA-SMA-GROUNDEDEDGE_SMA  [SMA-EDGE]  149.1,54.48 0 top
S12  ANTENNA-SMA-GROUNDEDEDGE_SMA  [SMA-EDGE]  19.56,80.39 0 top
S13  ANTENNA-SMA-GROUNDEDEDGE_SMA  [SMA-EDGE]  45.47,80.39 0 top
S14  ANTENNA-SMA-GROUNDEDEDGE_SMA  [SMA-EDGE]  71.37,80.39 0 top
S15  ANTENNA-SMA-GROUNDEDEDGE_SMA  [SMA-EDGE]  97.28,80.39 0 top
S16  ANTENNA-SMA-GROUNDEDEDGE_SMA  [SMA-EDGE]  123.19,80.39 0 top
S17  ANTENNA-SMA-GROUNDEDEDGE_SMA  [SMA-EDGE]  149.1,80.39 0 top
S18  ANTENNA-SMA-GROUNDEDEDGE_SMA  [SMA-EDGE]  19.56,106.3 0 top
S19  ANTENNA-SMA-GROUNDEDEDGE_SMA  [SMA-EDGE]  45.47,106.3 0 top
S20  ANTENNA-SMA-GROUNDEDEDGE_SMA  [SMA-EDGE]  71.37,106.3 0 top
S21  ANTENNA-SMA-GROUNDEDEDGE_SMA  [SMA-EDGE]  97.28,106.3 0 top
S22  ANTENNA-SMA-GROUNDEDEDGE_SMA  [SMA-EDGE]  123.19,106.3 0 top
S23  ANTENNA-SMA-GROUNDEDEDGE_SMA  [SMA-EDGE]  149.1,106.3 0 top
U1  BP2G1+_POWER_SPLITTER  [XX21]  19.56,18.29 180 top
U2  BP2G1+_POWER_SPLITTER  [XX21]  45.47,18.29 180 top
U3  BP2G1+_POWER_SPLITTER  [XX21]  71.37,18.29 180 top
U4  BP2G1+_POWER_SPLITTER  [XX21]  97.28,18.29 180 top
U5  BP2G1+_POWER_SPLITTER  [XX21]  123.19,18.29 180 top
U6  BP2G1+_POWER_SPLITTER  [XX21]  149.1,18.29 180 top
U7  BP2G1+_POWER_SPLITTER  [XX21]  19.56,44.2 180 top
U8  BP2G1+_POWER_SPLITTER  [XX21]  45.47,44.2 180 top
U9  BP2G1+_POWER_SPLITTER  [XX21]  71.37,44.2 180 top
U10  BP2G1+_POWER_SPLITTER  [XX21]  97.28,44.2 180 top
U11  BP2G1+_POWER_SPLITTER  [XX21]  123.19,44.2 180 top
U12  BP2G1+_POWER_SPLITTER  [XX21]  149.1,44.2 180 top
U13  BP2G1+_POWER_SPLITTER  [XX21]  19.56,70.1 180 top
U14  BP2G1+_POWER_SPLITTER  [XX21]  45.47,70.1 180 top
U15  BP2G1+_POWER_SPLITTER  [XX21]  71.37,70.1 180 top
U16  BP2G1+_POWER_SPLITTER  [XX21]  97.28,70.1 180 top
U17  BP2G1+_POWER_SPLITTER  [XX21]  123.19,70.1 180 top
U18  BP2G1+_POWER_SPLITTER  [XX21]  149.1,70.1 180 top
U19  BP2G1+_POWER_SPLITTER  [XX21]  19.56,96.01 180 top
U20  BP2G1+_POWER_SPLITTER  [XX21]  45.47,96.01 180 top
U21  BP2G1+_POWER_SPLITTER  [XX21]  71.37,96.01 180 top
U22  BP2G1+_POWER_SPLITTER  [XX21]  97.28,96.01 180 top
U23  BP2G1+_POWER_SPLITTER  [XX21]  123.19,96.01 180 top
U24  BP2G1+_POWER_SPLITTER  [XX21]  149.1,96.01 180 top
U$1  SPARKX-LOGO3  [SPARKX-SMALL]  28.45,24.64 0 top
U$2  SPARKX-LOGO3  [SPARKX-SMALL]  19.56,18.29 0 bottom
U$3  [10]  25.15,15.75 0 top
U$4  [20]  13.72,15.75 0 top
U$5  [S0]  18.54,24.89 0 top
U$6  [S0]  19.56,24.64 0 bottom
U$7  [10]  25.27,15.75 0 bottom
U$8  [20]  13.34,15.75 0 bottom
U$9  [#GND#0]  30.1,20.83 0 top
U$10  [#GND#1]  30.1,20.83 0 bottom
U$11  [#VCC#0]  30.1,18.29 0 top
U$12  [#VCC#1]  30.1,18.29 0 bottom
U$13  [GNSS0]  19.56,10.67 0 top
U$14  [P0]  17.91,9.14 0 top
U$15  [S__LITTER0]  19.56,9.4 0 top
U$16  [GNSS0]  19.56,10.67 0 bottom
U$17  [S__LITTER0]  19.56,9.4 0 bottom
U$18  [P0]  21.21,9.14 0 bottom
U$19  [#ILIM#0]  13.97,24.77 0 bottom
U$20  SPARKX-LOGO3  [SPARKX-SMALL]  54.36,24.64 0 top
U$21  SPARKX-LOGO3  [SPARKX-SMALL]  45.47,18.29 0 bottom
U$22  [10]  51.05,15.75 0 top
U$23  [20]  39.62,15.75 0 top
U$24  [S0]  44.45,24.89 0 top
U$25  [S0]  45.47,24.64 0 bottom
U$26  [10]  51.18,15.75 0 bottom
U$27  [20]  39.24,15.75 0 bottom
U$28  [#GND#0]  56.01,20.83 0 top
U$29  [#GND#1]  56.01,20.83 0 bottom
U$30  [GNSS0]  45.47,10.67 0 top
U$31  [S__LITTER0]  45.47,9.4 0 top
U$32  [P0]  43.81,9.14 0 top
U$33  [GNSS0]  45.47,10.67 0 bottom
U$34  [S__LITTER0]  45.47,9.4 0 bottom
U$35  [P0]  47.12,9.14 0 bottom
U$36  [#ILIM#0]  39.88,24.77 0 bottom
U$37  [#VCC#0]  56.01,18.29 0 top
U$38  [#VCC#1]  56.01,18.29 0 bottom
U$39  SPARKX-LOGO3  [SPARKX-SMALL]  80.26,24.64 0 top
U$40  SPARKX-LOGO3  [SPARKX-SMALL]  71.37,18.29 0 bottom
U$41  [10]  76.96,15.75 0 top
U$42  [20]  65.53,15.75 0 top
U$43  [S0]  70.36,24.89 0 top
U$44  [S0]  71.37,24.64 0 bottom
U$45  [10]  77.09,15.75 0 bottom
U$46  [20]  65.15,15.75 0 bottom
U$47  [#GND#0]  81.92,20.83 0 top
U$48  [#GND#1]  81.92,20.83 0 bottom
U$49  [GNSS0]  71.37,10.67 0 top
U$50  [S__LITTER0]  71.37,9.4 0 top
U$51  [P0]  69.72,9.14 0 top
U$52  [GNSS0]  71.37,10.67 0 bottom
U$53  [S__LITTER0]  71.37,9.4 0 bottom
U$54  [P0]  73.03,9.14 0 bottom
U$55  [#ILIM#0]  65.79,24.77 0 bottom
U$56  [#VCC#0]  81.92,18.29 0 top
U$57  [#VCC#1]  81.92,18.29 0 bottom
U$58  SPARKX-LOGO3  [SPARKX-SMALL]  106.17,24.64 0 top
U$59  SPARKX-LOGO3  [SPARKX-SMALL]  97.28,18.29 0 bottom
U$60  [10]  102.87,15.75 0 top
U$61  [20]  91.44,15.75 0 top
U$62  [S0]  96.27,24.89 0 top
U$63  [S0]  97.28,24.64 0 bottom
U$64  [10]  103,15.75 0 bottom
U$65  [20]  91.06,15.75 0 bottom
U$66  [#GND#0]  107.82,20.83 0 top
U$67  [#GND#1]  107.82,20.83 0 bottom
U$68  [GNSS0]  97.28,10.67 0 top
U$69  [S__LITTER0]  97.28,9.4 0 top
U$70  [P0]  95.63,9.14 0 top
U$71  [GNSS0]  97.28,10.67 0 bottom
U$72  [S__LITTER0]  97.28,9.4 0 bottom
U$73  [P0]  98.93,9.14 0 bottom
U$74  [#ILIM#0]  91.69,24.77 0 bottom
U$75  [#VCC#0]  107.82,18.29 0 top
U$76  [#VCC#1]  107.82,18.29 0 bottom
U$77  SPARKX-LOGO3  [SPARKX-SMALL]  132.08,24.64 0 top
U$78  SPARKX-LOGO3  [SPARKX-SMALL]  123.19,18.29 0 bottom
U$79  [10]  128.78,15.75 0 top
U$80  [20]  117.35,15.75 0 top
U$81  [S0]  122.17,24.89 0 top
U$82  [S0]  123.19,24.64 0 bottom
U$83  [10]  128.91,15.75 0 bottom
U$84  [20]  116.97,15.75 0 bottom
U$85  [#GND#0]  133.73,20.83 0 top
U$86  [#GND#1]  133.73,20.83 0 bottom
U$87  [GNSS0]  123.19,10.67 0 top
U$88  [S__LITTER0]  123.19,9.4 0 top
U$89  [P0]  121.54,9.14 0 top
U$90  [GNSS0]  123.19,10.67 0 bottom
U$91  [S__LITTER0]  123.19,9.4 0 bottom
U$92  [P0]  124.84,9.14 0 bottom
U$93  [#ILIM#0]  117.6,24.77 0 bottom
U$94  [#VCC#0]  133.73,18.29 0 top
U$95  [#VCC#1]  133.73,18.29 0 bottom
U$96  SPARKX-LOGO3  [SPARKX-SMALL]  157.99,24.64 0 top
U$97  SPARKX-LOGO3  [SPARKX-SMALL]  149.1,18.29 0 bottom
U$98  [10]  154.69,15.75 0 top
U$99  [20]  143.26,15.75 0 top
U$100  [S0]  148.08,24.89 0 top
U$101  [S0]  149.1,24.64 0 bottom
U$102  [10]  154.81,15.75 0 bottom
U$103  [20]  142.88,15.75 0 bottom
U$104  [#GND#0]  159.64,20.83 0 top
U$105  [#GND#1]  159.64,20.83 0 bottom
U$106  [GNSS0]  149.1,10.67 0 top
U$107  [S__LITTER0]  149.1,9.4 0 top
U$108  [P0]  147.45,9.14 0 top
U$109  [GNSS0]  149.1,10.67 0 bottom
U$110  [S__LITTER0]  149.1,9.4 0 bottom
U$111  [P0]  150.75,9.14 0 bottom
U$112  [#ILIM#0]  143.51,24.77 0 bottom
U$113  [#VCC#0]  159.64,18.29 0 top
U$114  [#VCC#1]  159.64,18.29 0 bottom
U$115  SPARKX-LOGO3  [SPARKX-SMALL]  28.45,50.55 0 top
U$116  SPARKX-LOGO3  [SPARKX-SMALL]  19.56,44.2 0 bottom
U$117  [10]  25.15,41.66 0 top
U$118  [20]  13.72,41.66 0 top
U$119  [S0]  18.54,50.8 0 top
U$120  [S0]  19.56,50.55 0 bottom
U$121  [10]  25.27,41.66 0 bottom
U$122  [20]  13.34,41.66 0 bottom
U$123  [#GND#0]  30.1,46.74 0 top
U$124  [#GND#1]  30.1,46.74 0 bottom
U$125  [GNSS0]  19.56,36.58 0 top
U$126  [S__LITTER0]  19.56,35.31 0 top
U$127  [P0]  17.91,35.05 0 top
U$128  [GNSS0]  19.56,36.58 0 bottom
U$129  [S__LITTER0]  19.56,35.31 0 bottom
U$130  [P0]  21.21,35.05 0 bottom
U$131  [#ILIM#0]  13.97,50.67 0 bottom
U$132  [#VCC#0]  30.1,44.2 0 top
U$133  [#VCC#1]  30.1,44.2 0 bottom
U$134  SPARKX-LOGO3  [SPARKX-SMALL]  54.36,50.55 0 top
U$135  SPARKX-LOGO3  [SPARKX-SMALL]  45.47,44.2 0 bottom
U$136  [10]  51.05,41.66 0 top
U$137  [20]  39.62,41.66 0 top
U$138  [S0]  44.45,50.8 0 top
U$139  [S0]  45.47,50.55 0 bottom
U$140  [10]  51.18,41.66 0 bottom
U$141  [20]  39.24,41.66 0 bottom
U$142  [#GND#0]  56.01,46.74 0 top
U$143  [#GND#1]  56.01,46.74 0 bottom
U$144  [GNSS0]  45.47,36.58 0 top
U$145  [S__LITTER0]  45.47,35.31 0 top
U$146  [P0]  43.81,35.05 0 top
U$147  [GNSS0]  45.47,36.58 0 bottom
U$148  [S__LITTER0]  45.47,35.31 0 bottom
U$149  [P0]  47.12,35.05 0 bottom
U$150  [#ILIM#0]  39.88,50.67 0 bottom
U$151  [#VCC#0]  56.01,44.2 0 top
U$152  [#VCC#1]  56.01,44.2 0 bottom
U$153  SPARKX-LOGO3  [SPARKX-SMALL]  80.26,50.55 0 top
U$154  SPARKX-LOGO3  [SPARKX-SMALL]  71.37,44.2 0 bottom
U$155  [10]  76.96,41.66 0 top
U$156  [20]  65.53,41.66 0 top
U$157  [S0]  70.36,50.8 0 top
U$158  [S0]  71.37,50.55 0 bottom
U$159  [10]  77.09,41.66 0 bottom
U$160  [20]  65.15,41.66 0 bottom
U$161  [#GND#0]  81.92,46.74 0 top
U$162  [#GND#1]  81.92,46.74 0 bottom
U$163  [GNSS0]  71.37,36.58 0 top
U$164  [S__LITTER0]  71.37,35.31 0 top
U$165  [P0]  69.72,35.05 0 top
U$166  [GNSS0]  71.37,36.58 0 bottom
U$167  [S__LITTER0]  71.37,35.31 0 bottom
U$168  [P0]  73.03,35.05 0 bottom
U$169  [#ILIM#0]  65.79,50.67 0 bottom
U$170  [#VCC#0]  81.92,44.2 0 top
U$171  [#VCC#1]  81.92,44.2 0 bottom
U$172  SPARKX-LOGO3  [SPARKX-SMALL]  106.17,50.55 0 top
U$173  SPARKX-LOGO3  [SPARKX-SMALL]  97.28,44.2 0 bottom
U$174  [10]  102.87,41.66 0 top
U$175  [20]  91.44,41.66 0 top
U$176  [S0]  96.27,50.8 0 top
U$177  [S0]  97.28,50.55 0 bottom
U$178  [10]  103,41.66 0 bottom
U$179  [20]  91.06,41.66 0 bottom
U$180  [#GND#0]  107.82,46.74 0 top
U$181  [#GND#1]  107.82,46.74 0 bottom
U$182  [GNSS0]  97.28,36.58 0 top
U$183  [S__LITTER0]  97.28,35.31 0 top
U$184  [P0]  95.63,35.05 0 top
U$185  [GNSS0]  97.28,36.58 0 bottom
U$186  [S__LITTER0]  97.28,35.31 0 bottom
U$187  [P0]  98.93,35.05 0 bottom
U$188  [#ILIM#0]  91.69,50.67 0 bottom
U$189  [#VCC#0]  107.82,44.2 0 top
U$190  [#VCC#1]  107.82,44.2 0 bottom
U$191  SPARKX-LOGO3  [SPARKX-SMALL]  132.08,50.55 0 top
U$192  SPARKX-LOGO3  [SPARKX-SMALL]  123.19,44.2 0 bottom
U$193  [10]  128.78,41.66 0 top
U$194  [20]  117.35,41.66 0 top
U$195  [S0]  122.17,50.8 0 top
U$196  [S0]  123.19,50.55 0 bottom
U$197  [10]  128.91,41.66 0 bottom
U$198  [20]  116.97,41.66 0 bottom
U$199  [#GND#0]  133.73,46.74 0 top
U$200  [#GND#1]  133.73,46.74 0 bottom
U$201  [GNSS0]  123.19,36.58 0 top
U$202  [S__LITTER0]  123.19,35.31 0 top
U$203  [P0]  121.54,35.05 0 top
U$204  [GNSS0]  123.19,36.58 0 bottom
U$205  [S__LITTER0]  123.19,35.31 0 bottom
U$206  [P0]  124.84,35.05 0 bottom
U$207  [#ILIM#0]  117.6,50.67 0 bottom
U$208  [#VCC#0]  133.73,44.2 0 top
U$209  [#VCC#1]  133.73,44.2 0 bottom
U$210  SPARKX-LOGO3  [SPARKX-SMALL]  157.99,50.55 0 top
U$211  SPARKX-LOGO3  [SPARKX-SMALL]  149.1,44.2 0 bottom
U$212  [10]  154.69,41.66 0 top
U$213  [20]  143.26,41.66 0 top
U$214  [S0]  148.08,50.8 0 top
U$215  [S0]  149.1,50.55 0 bottom
U$216  [10]  154.81,41.66 0 bottom
U$217  [20]  142.88,41.66 0 bottom
U$218  [#GND#0]  159.64,46.74 0 top
U$219  [#GND#1]  159.64,46.74 0 bottom
U$220  [GNSS0]  149.1,36.58 0 top
U$221  [S__LITTER0]  149.1,35.31 0 top
U$222  [P0]  147.45,35.05 0 top
U$223  [GNSS0]  149.1,36.58 0 bottom
U$224  [S__LITTER0]  149.1,35.31 0 bottom
U$225  [P0]  150.75,35.05 0 bottom
U$226  [#ILIM#0]  143.51,50.67 0 bottom
U$227  [#VCC#0]  159.64,44.2 0 top
U$228  [#VCC#1]  159.64,44.2 0 bottom
U$229  SPARKX-LOGO3  [SPARKX-SMALL]  28.45,76.45 0 top
U$230  SPARKX-LOGO3  [SPARKX-SMALL]  19.56,70.1 0 bottom
U$231  [10]  25.15,67.56 0 top
U$232  [20]  13.72,67.56 0 top
U$233  [S0]  18.54,76.71 0 top
U$234  [S0]  19.56,76.45 0 bottom
U$235  [10]  25.27,67.56 0 bottom
U$236  [20]  13.34,67.56 0 bottom
U$237  [#GND#0]  30.1,72.64 0 top
U$238  [#GND#1]  30.1,72.64 0 bottom
U$239  [GNSS0]  19.56,62.48 0 top
U$240  [S__LITTER0]  19.56,61.21 0 top
U$241  [P0]  17.91,60.96 0 top
U$242  [GNSS0]  19.56,62.48 0 bottom
U$243  [S__LITTER0]  19.56,61.21 0 bottom
U$244  [P0]  21.21,60.96 0 bottom
U$245  [#ILIM#0]  13.97,76.58 0 bottom
U$246  [#VCC#0]  30.1,70.1 0 top
U$247  [#VCC#1]  30.1,70.1 0 bottom
U$248  SPARKX-LOGO3  [SPARKX-SMALL]  54.36,76.45 0 top
U$249  SPARKX-LOGO3  [SPARKX-SMALL]  45.47,70.1 0 bottom
U$250  [10]  51.05,67.56 0 top
U$251  [20]  39.62,67.56 0 top
U$252  [S0]  44.45,76.71 0 top
U$253  [S0]  45.47,76.45 0 bottom
U$254  [10]  51.18,67.56 0 bottom
U$255  [20]  39.24,67.56 0 bottom
U$256  [#GND#0]  56.01,72.64 0 top
U$257  [#GND#1]  56.01,72.64 0 bottom
U$258  [GNSS0]  45.47,62.48 0 top
U$259  [S__LITTER0]  45.47,61.21 0 top
U$260  [P0]  43.81,60.96 0 top
U$261  [GNSS0]  45.47,62.48 0 bottom
U$262  [S__LITTER0]  45.47,61.21 0 bottom
U$263  [P0]  47.12,60.96 0 bottom
U$264  [#ILIM#0]  39.88,76.58 0 bottom
U$265  [#VCC#0]  56.01,70.1 0 top
U$266  [#VCC#1]  56.01,70.1 0 bottom
U$267  SPARKX-LOGO3  [SPARKX-SMALL]  80.26,76.45 0 top
U$268  SPARKX-LOGO3  [SPARKX-SMALL]  71.37,70.1 0 bottom
U$269  [10]  76.96,67.56 0 top
U$270  [20]  65.53,67.56 0 top
U$271  [S0]  70.36,76.71 0 top
U$272  [S0]  71.37,76.45 0 bottom
U$273  [10]  77.09,67.56 0 bottom
U$274  [20]  65.15,67.56 0 bottom
U$275  [#GND#0]  81.92,72.64 0 top
U$276  [#GND#1]  81.92,72.64 0 bottom
U$277  [GNSS0]  71.37,62.48 0 top
U$278  [S__LITTER0]  71.37,61.21 0 top
U$279  [P0]  69.72,60.96 0 top
U$280  [GNSS0]  71.37,62.48 0 bottom
U$281  [S__LITTER0]  71.37,61.21 0 bottom
U$282  [P0]  73.03,60.96 0 bottom
U$283  [#ILIM#0]  65.79,76.58 0 bottom
U$284  [#VCC#0]  81.92,70.1 0 top
U$285  [#VCC#1]  81.92,70.1 0 bottom
U$286  SPARKX-LOGO3  [SPARKX-SMALL]  106.17,76.45 0 top
U$287  SPARKX-LOGO3  [SPARKX-SMALL]  97.28,70.1 0 bottom
U$288  [10]  102.87,67.56 0 top
U$289  [20]  91.44,67.56 0 top
U$290  [S0]  96.27,76.71 0 top
U$291  [S0]  97.28,76.45 0 bottom
U$292  [10]  103,67.56 0 bottom
U$293  [20]  91.06,67.56 0 bottom
U$294  [#GND#0]  107.82,72.64 0 top
U$295  [#GND#1]  107.82,72.64 0 bottom
U$296  [GNSS0]  97.28,62.48 0 top
U$297  [S__LITTER0]  97.28,61.21 0 top
U$298  [P0]  95.63,60.96 0 top
U$299  [GNSS0]  97.28,62.48 0 bottom
U$300  [S__LITTER0]  97.28,61.21 0 bottom
U$301  [P0]  98.93,60.96 0 bottom
U$302  [#ILIM#0]  91.69,76.58 0 bottom
U$303  [#VCC#0]  107.82,70.1 0 top
U$304  [#VCC#1]  107.82,70.1 0 bottom
U$305  SPARKX-LOGO3  [SPARKX-SMALL]  132.08,76.45 0 top
U$306  SPARKX-LOGO3  [SPARKX-SMALL]  123.19,70.1 0 bottom
U$307  [10]  128.78,67.56 0 top
U$308  [20]  117.35,67.56 0 top
U$309  [S0]  122.17,76.71 0 top
U$310  [S0]  123.19,76.45 0 bottom
U$311  [10]  128.91,67.56 0 bottom
U$312  [20]  116.97,67.56 0 bottom
U$313  [#GND#0]  133.73,72.64 0 top
U$314  [#GND#1]  133.73,72.64 0 bottom
U$315  [GNSS0]  123.19,62.48 0 top
U$316  [S__LITTER0]  123.19,61.21 0 top
U$317  [P0]  121.54,60.96 0 top
U$318  [GNSS0]  123.19,62.48 0 bottom
U$319  [S__LITTER0]  123.19,61.21 0 bottom
U$320  [P0]  124.84,60.96 0 bottom
U$321  [#ILIM#0]  117.6,76.58 0 bottom
U$322  [#VCC#0]  133.73,70.1 0 top
U$323  [#VCC#1]  133.73,70.1 0 bottom
U$324  SPARKX-LOGO3  [SPARKX-SMALL]  157.99,76.45 0 top
U$325  SPARKX-LOGO3  [SPARKX-SMALL]  149.1,70.1 0 bottom
U$326  [10]  154.69,67.56 0 top
U$327  [20]  143.26,67.56 0 top
U$328  [S0]  148.08,76.71 0 top
U$329  [S0]  149.1,76.45 0 bottom
U$330  [10]  154.81,67.56 0 bottom
U$331  [20]  142.88,67.56 0 bottom
U$332  [#GND#0]  159.64,72.64 0 top
U$333  [#GND#1]  159.64,72.64 0 bottom
U$334  [GNSS0]  149.1,62.48 0 top
U$335  [S__LITTER0]  149.1,61.21 0 top
U$336  [P0]  147.45,60.96 0 top
U$337  [GNSS0]  149.1,62.48 0 bottom
U$338  [S__LITTER0]  149.1,61.21 0 bottom
U$339  [P0]  150.75,60.96 0 bottom
U$340  [#ILIM#0]  143.51,76.58 0 bottom
U$341  [#VCC#0]  159.64,70.1 0 top
U$342  [#VCC#1]  159.64,70.1 0 bottom
U$343  SPARKX-LOGO3  [SPARKX-SMALL]  28.45,102.36 0 top
U$344  SPARKX-LOGO3  [SPARKX-SMALL]  19.56,96.01 0 bottom
U$345  [10]  25.15,93.47 0 top
U$346  [20]  13.72,93.47 0 top
U$347  [S0]  18.54,102.62 0 top
U$348  [S0]  19.56,102.36 0 bottom
U$349  [10]  25.27,93.47 0 bottom
U$350  [20]  13.34,93.47 0 bottom
U$351  [#GND#0]  30.1,98.55 0 top
U$352  [#GND#1]  30.1,98.55 0 bottom
U$353  [GNSS0]  19.56,88.39 0 top
U$354  [S__LITTER0]  19.56,87.12 0 top
U$355  [P0]  17.91,86.87 0 top
U$356  [GNSS0]  19.56,88.39 0 bottom
U$357  [S__LITTER0]  19.56,87.12 0 bottom
U$358  [P0]  21.21,86.87 0 bottom
U$359  [#ILIM#0]  13.97,102.49 0 bottom
U$360  [#VCC#0]  30.1,96.01 0 top
U$361  [#VCC#1]  30.1,96.01 0 bottom
U$362  SPARKX-LOGO3  [SPARKX-SMALL]  54.36,102.36 0 top
U$363  SPARKX-LOGO3  [SPARKX-SMALL]  45.47,96.01 0 bottom
U$364  [10]  51.05,93.47 0 top
U$365  [20]  39.62,93.47 0 top
U$366  [S0]  44.45,102.62 0 top
U$367  [S0]  45.47,102.36 0 bottom
U$368  [10]  51.18,93.47 0 bottom
U$369  [20]  39.24,93.47 0 bottom
U$370  [#GND#0]  56.01,98.55 0 top
U$371  [#GND#1]  56.01,98.55 0 bottom
U$372  [GNSS0]  45.47,88.39 0 top
U$373  [S__LITTER0]  45.47,87.12 0 top
U$374  [P0]  43.81,86.87 0 top
U$375  [GNSS0]  45.47,88.39 0 bottom
U$376  [S__LITTER0]  45.47,87.12 0 bottom
U$377  [P0]  47.12,86.87 0 bottom
U$378  [#ILIM#0]  39.88,102.49 0 bottom
U$379  [#VCC#0]  56.01,96.01 0 top
U$380  [#VCC#1]  56.01,96.01 0 bottom
U$381  SPARKX-LOGO3  [SPARKX-SMALL]  80.26,102.36 0 top
U$382  SPARKX-LOGO3  [SPARKX-SMALL]  71.37,96.01 0 bottom
U$383  [10]  76.96,93.47 0 top
U$384  [20]  65.53,93.47 0 top
U$385  [S0]  70.36,102.62 0 top
U$386  [S0]  71.37,102.36 0 bottom
U$387  [10]  77.09,93.47 0 bottom
U$388  [20]  65.15,93.47 0 bottom
U$389  [#GND#0]  81.92,98.55 0 top
U$390  [#GND#1]  81.92,98.55 0 bottom
U$391  [GNSS0]  71.37,88.39 0 top
U$392  [S__LITTER0]  71.37,87.12 0 top
U$393  [P0]  69.72,86.87 0 top
U$394  [GNSS0]  71.37,88.39 0 bottom
U$395  [S__LITTER0]  71.37,87.12 0 bottom
U$396  [P0]  73.03,86.87 0 bottom
U$397  [#ILIM#0]  65.79,102.49 0 bottom
U$398  [#VCC#0]  81.92,96.01 0 top
U$399  [#VCC#1]  81.92,96.01 0 bottom
U$400  SPARKX-LOGO3  [SPARKX-SMALL]  106.17,102.36 0 top
U$401  SPARKX-LOGO3  [SPARKX-SMALL]  97.28,96.01 0 bottom
U$402  [10]  102.87,93.47 0 top
U$403  [20]  91.44,93.47 0 top
U$404  [S0]  96.27,102.62 0 top
U$405  [S0]  97.28,102.36 0 bottom
U$406  [10]  103,93.47 0 bottom
U$407  [20]  91.06,93.47 0 bottom
U$408  [#GND#0]  107.82,98.55 0 top
U$409  [#GND#1]  107.82,98.55 0 bottom
U$410  [GNSS0]  97.28,88.39 0 top
U$411  [S__LITTER0]  97.28,87.12 0 top
U$412  [P0]  95.63,86.87 0 top
U$413  [GNSS0]  97.28,88.39 0 bottom
U$414  [S__LITTER0]  97.28,87.12 0 bottom
U$415  [P0]  98.93,86.87 0 bottom
U$416  [#ILIM#0]  91.69,102.49 0 bottom
U$417  [#VCC#0]  107.82,96.01 0 top
U$418  [#VCC#1]  107.82,96.01 0 bottom
U$419  SPARKX-LOGO3  [SPARKX-SMALL]  132.08,102.36 0 top
U$420  SPARKX-LOGO3  [SPARKX-SMALL]  123.19,96.01 0 bottom
U$421  [10]  128.78,93.47 0 top
U$422  [20]  117.35,93.47 0 top
U$423  [S0]  122.17,102.62 0 top
U$424  [S0]  123.19,102.36 0 bottom
U$425  [10]  128.91,93.47 0 bottom
U$426  [20]  116.97,93.47 0 bottom
U$427  [#GND#0]  133.73,98.55 0 top
U$428  [#GND#1]  133.73,98.55 0 bottom
U$429  [GNSS0]  123.19,88.39 0 top
U$430  [S__LITTER0]  123.19,87.12 0 top
U$431  [P0]  121.54,86.87 0 top
U$432  [GNSS0]  123.19,88.39 0 bottom
U$433  [S__LITTER0]  123.19,87.12 0 bottom
U$434  [P0]  124.84,86.87 0 bottom
U$435  [#ILIM#0]  117.6,102.49 0 bottom
U$436  [#VCC#0]  133.73,96.01 0 top
U$437  [#VCC#1]  133.73,96.01 0 bottom
U$438  SPARKX-LOGO3  [SPARKX-SMALL]  157.99,102.36 0 top
U$439  SPARKX-LOGO3  [SPARKX-SMALL]  149.1,96.01 0 bottom
U$440  [10]  154.69,93.47 0 top
U$441  [20]  143.26,93.47 0 top
U$442  [S0]  148.08,102.62 0 top
U$443  [S0]  149.1,102.36 0 bottom
U$444  [10]  154.81,93.47 0 bottom
U$445  [20]  142.88,93.47 0 bottom
U$446  [#GND#0]  159.64,98.55 0 top
U$447  [#GND#1]  159.64,98.55 0 bottom
U$448  [GNSS0]  149.1,88.39 0 top
U$449  [S__LITTER0]  149.1,87.12 0 top
U$450  [P0]  147.45,86.87 0 top
U$451  [GNSS0]  149.1,88.39 0 bottom
U$452  [S__LITTER0]  149.1,87.12 0 bottom
U$453  [P0]  150.75,86.87 0 bottom
U$454  [#ILIM#0]  143.51,102.49 0 bottom
U$455  [#VCC#0]  159.64,96.01 0 top
U$456  [#VCC#1]  159.64,96.01 0 bottom